# Altium PCB PCB2.PcbDoc (part 1 of 3)
Units mil, origin at the board's own origin, x right, y up, seen from the top; angles counter-clockwise.
Board outline 5145 x 1874.68 mil, 6 copper layers (Top Copper, Signal Layer 1, Signal Layer 2, Signal Layer 3, Signal Layer 4, Bottom Copper), stack 60.567 mil thick; 68 components, 78 nets, 530 pads, 288 vias.
Unrouted connection lines stored in the file: 13.
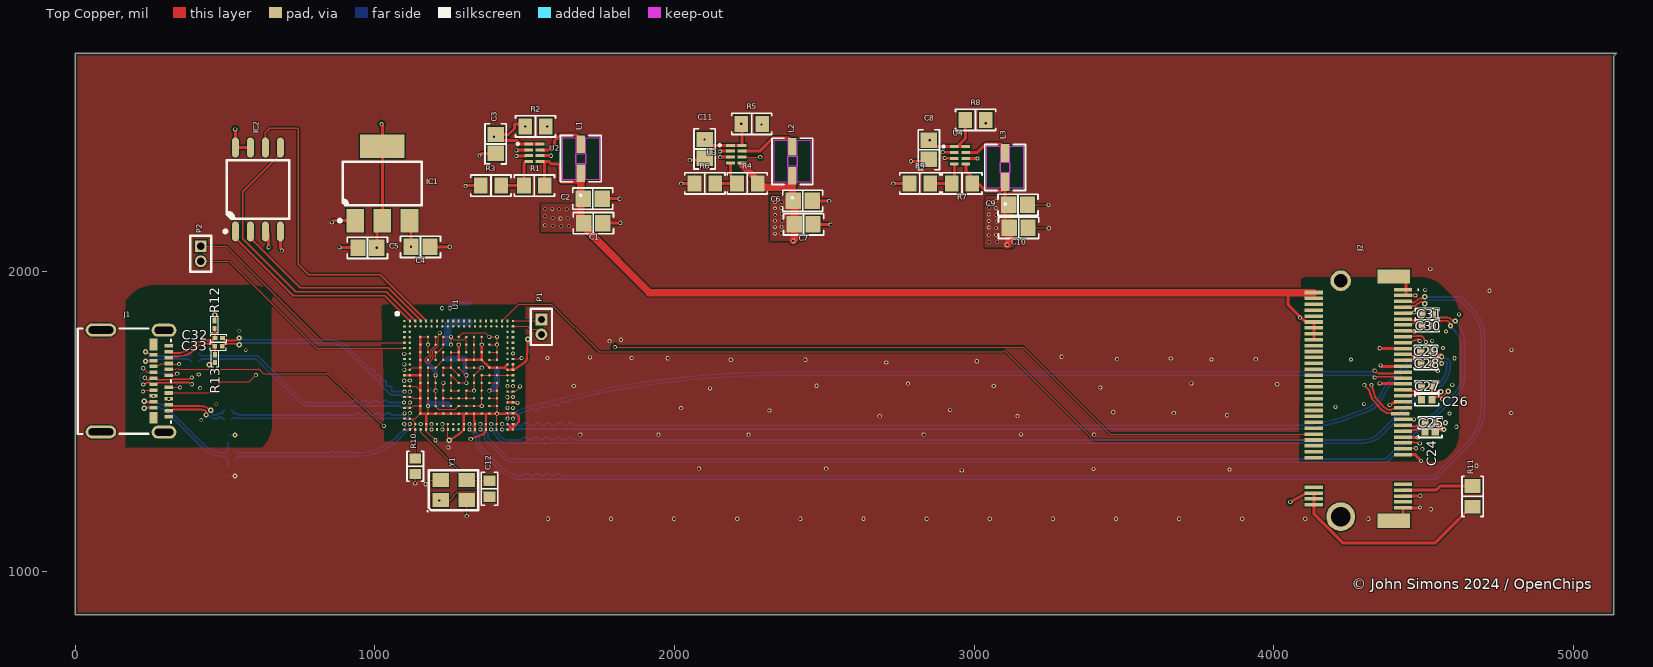
[diagram p0: Top Copper view]
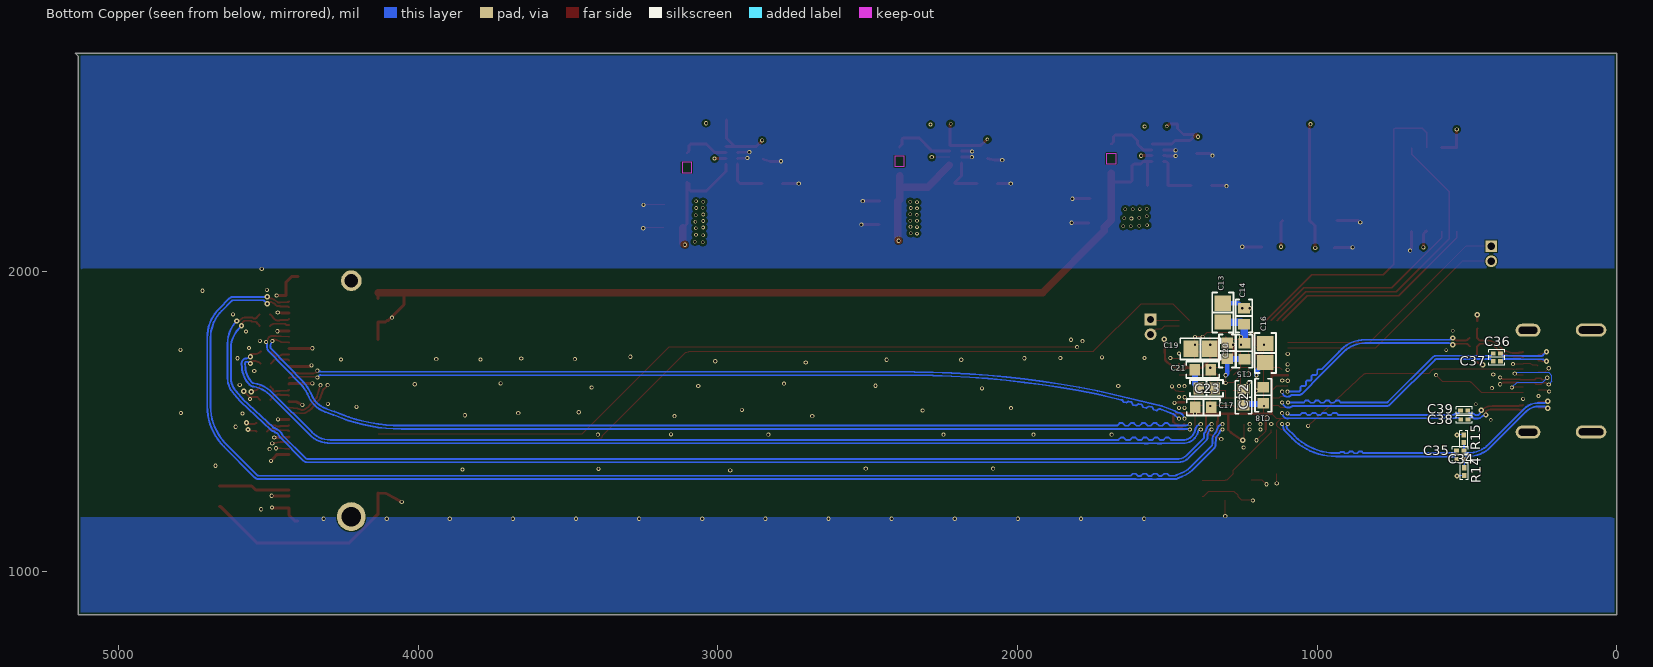
[diagram p1: Bottom Copper view, seen from below]
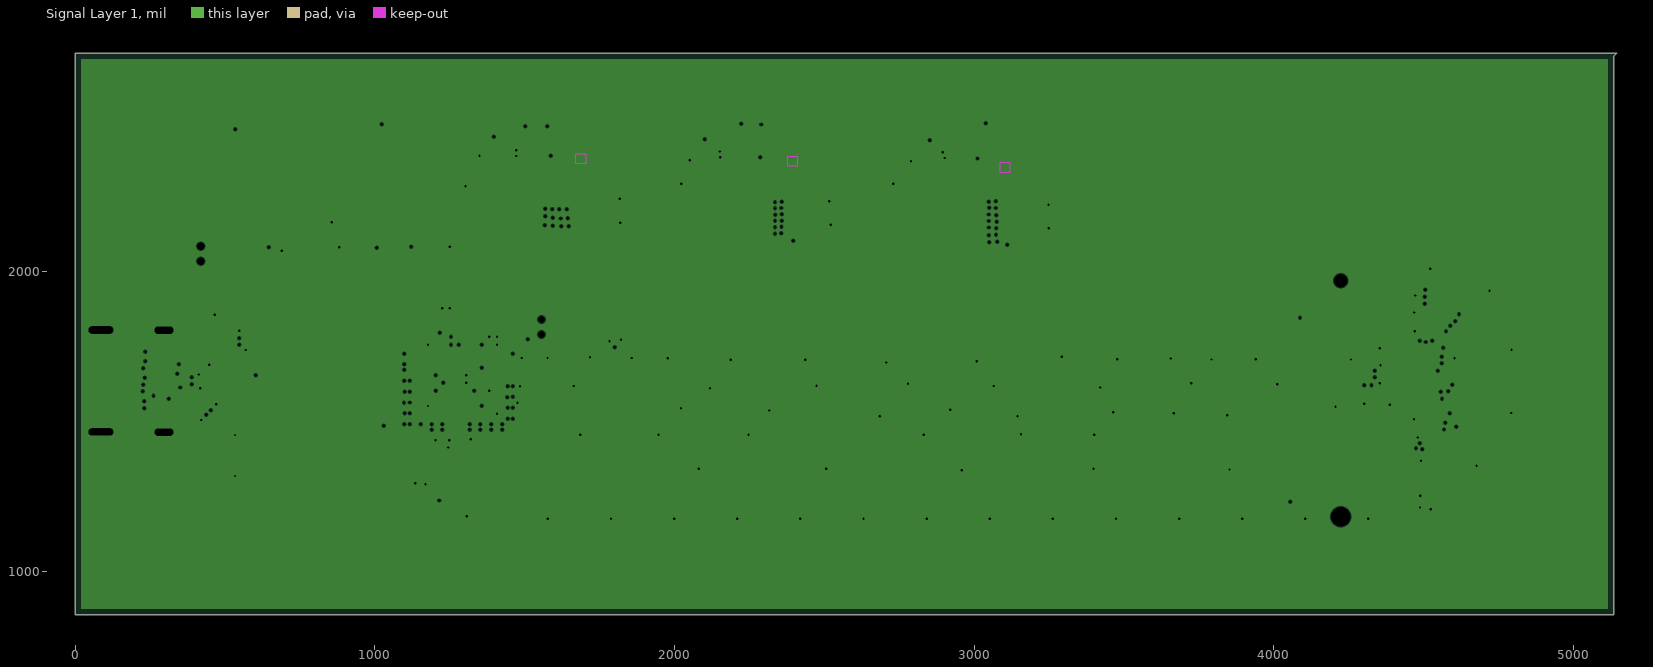
[diagram p2: Signal Layer 1, clearances drawn from the general rule]
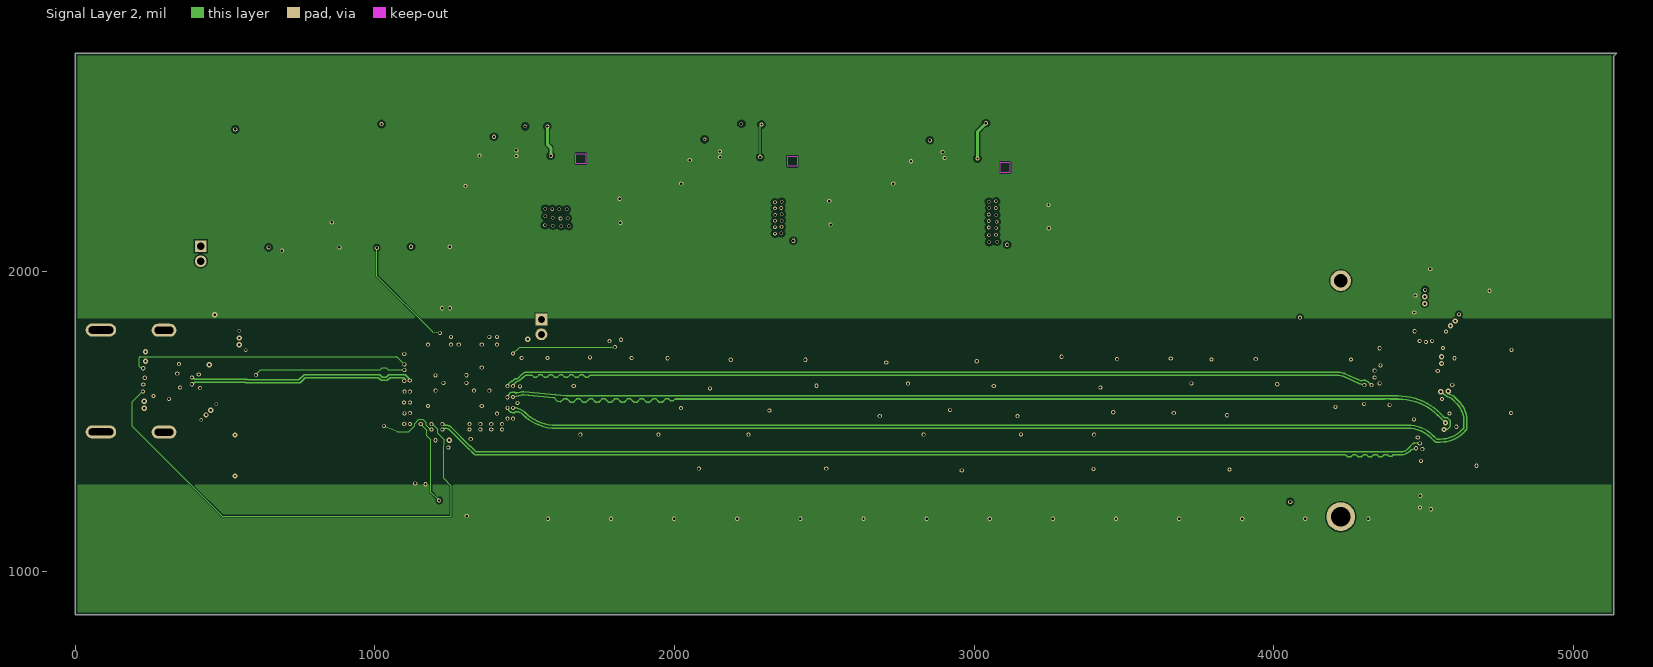
[diagram p3: Signal Layer 2]
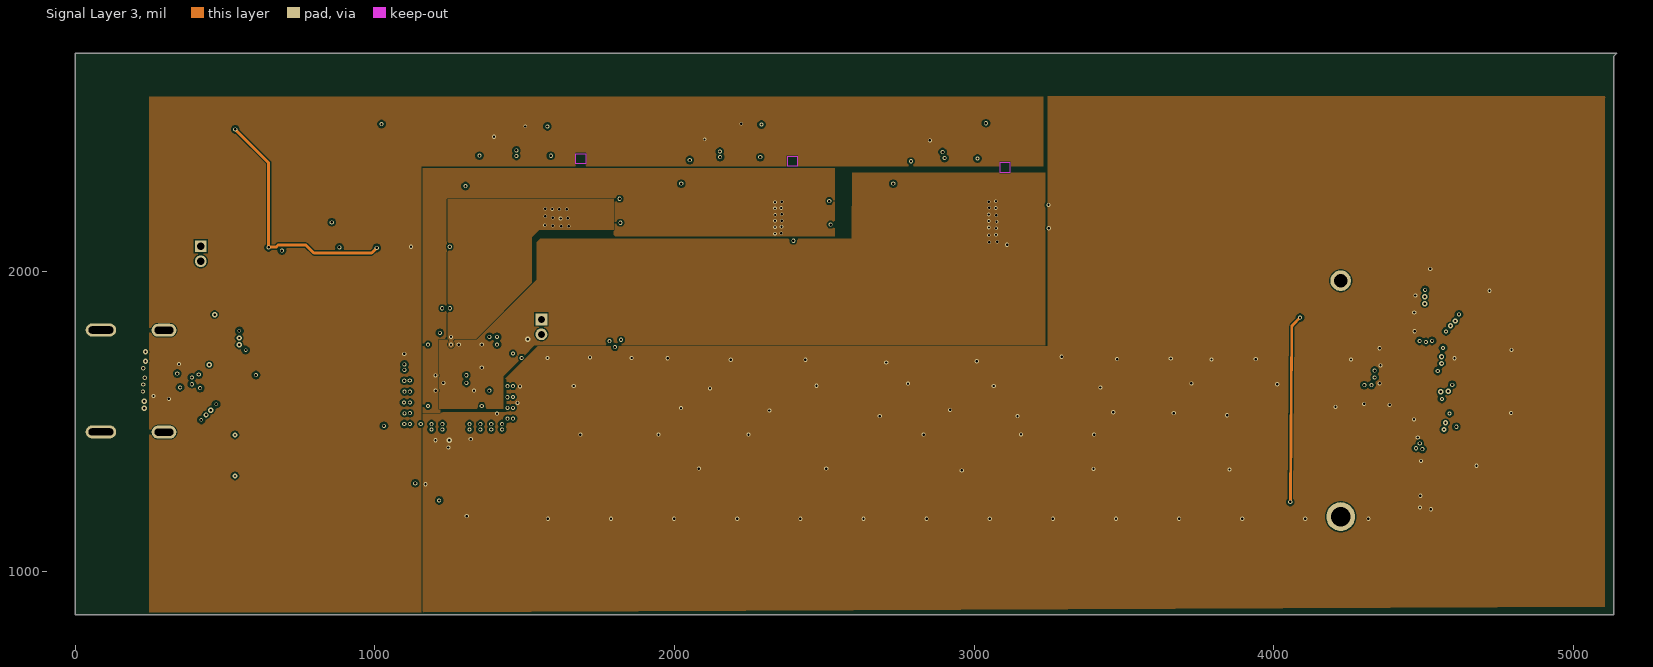
[diagram p4: Signal Layer 3]
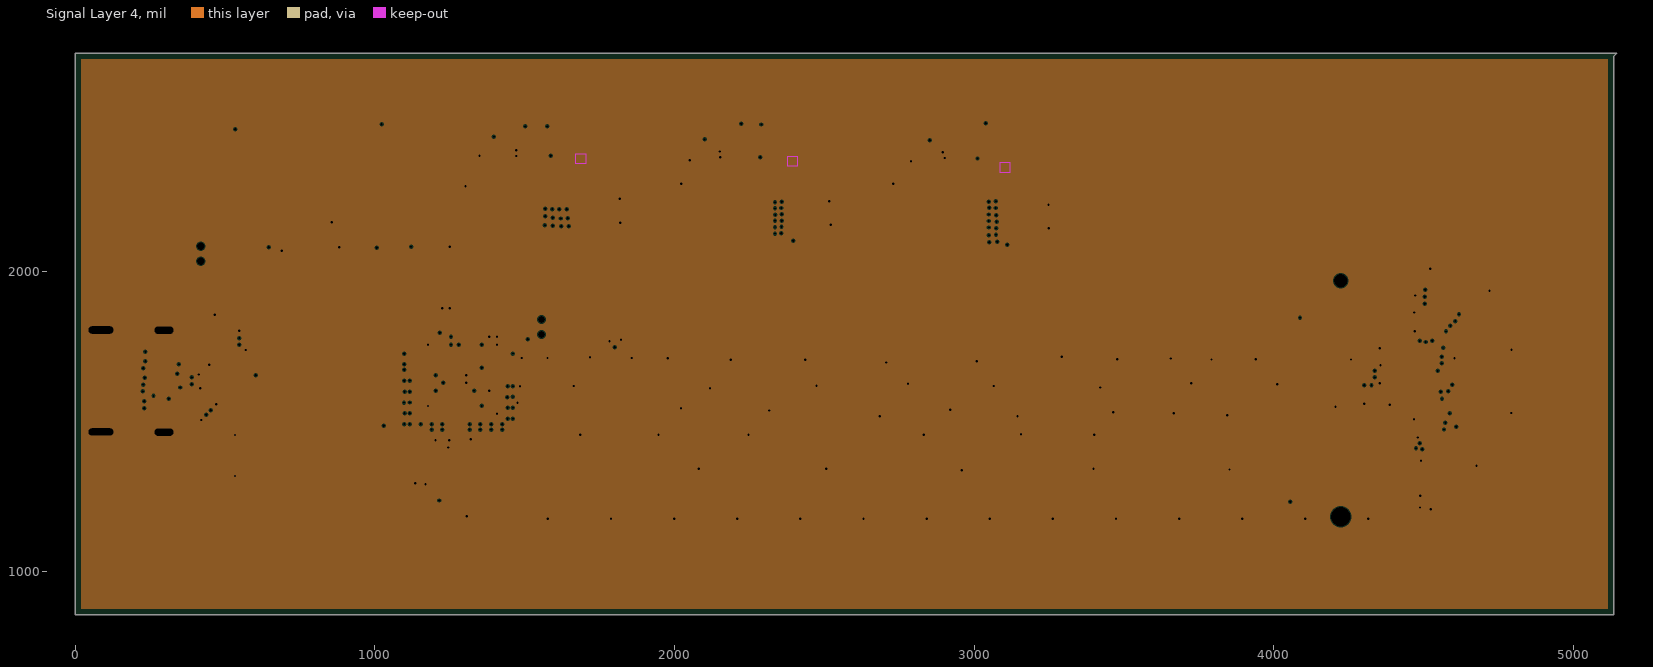
[diagram p5: Signal Layer 4, clearances drawn from the general rule]
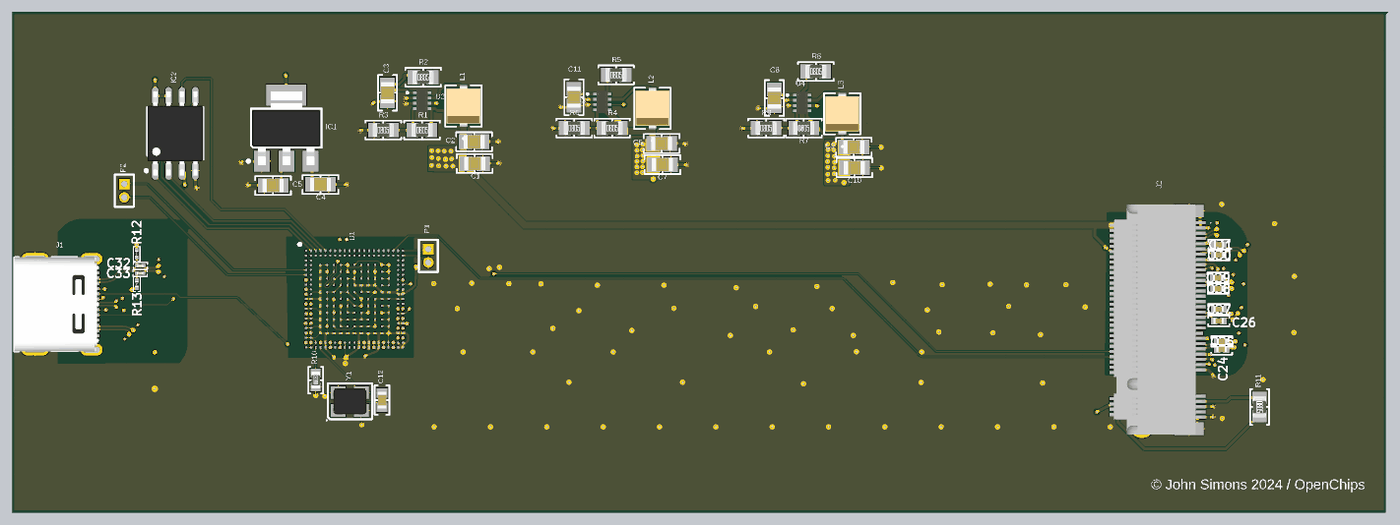
[diagram p7: 3D render of the assembled board from above, using the file's embedded part models]
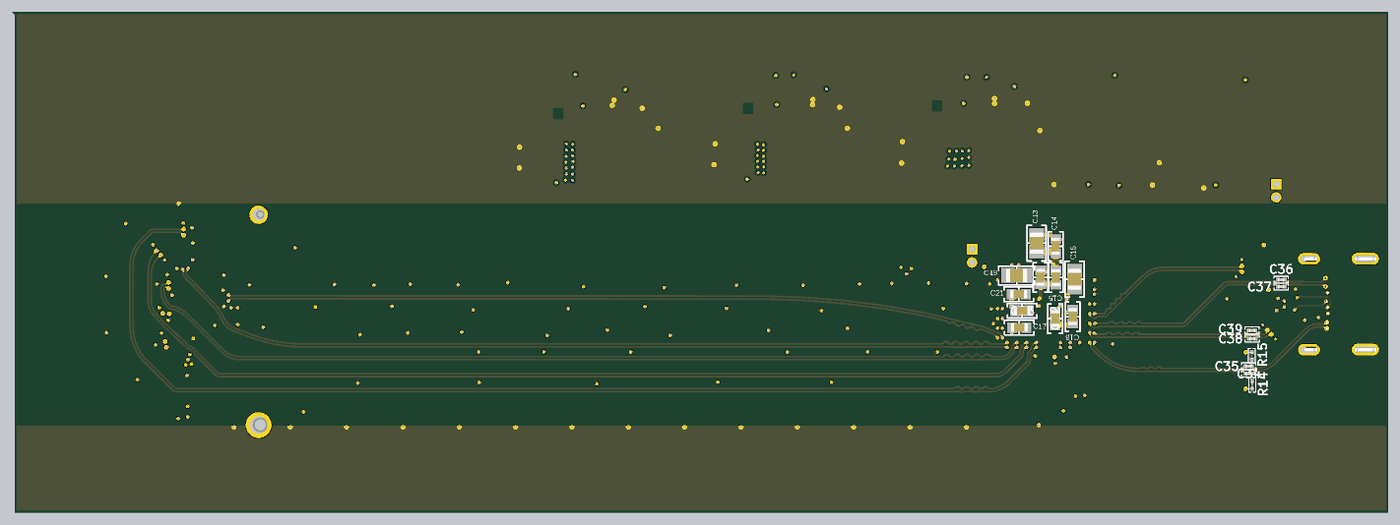
[diagram p8: 3D render of the assembled board from below, using the file's embedded part models]

## Layer stack, top to bottom
Top Mask: solder mask 0.5909, Solder Resist, Dk 3.8
Top Copper: signal copper 1.378
Dielectric 1: prepreg 3.9134, 2313, Dk 4.05
Signal Layer 1: plane copper 0.5984, net GND
Core 1: core 21.6535, FR-4, Dk 4.5
Signal Layer 2: signal copper 0.5984
Dielectric 2: prepreg 4.2835, 2116, Dk 4.25
Signal Layer 3: signal copper 0.5984
Core 2: core 21.6535, FR-4, Dk 4.5
Signal Layer 4: plane copper 0.5984, net GND
Dielectric 3: prepreg 3.9134, 2313, Dk 4.05
Bottom Copper: signal copper 1.378
Bottom Mask: solder mask 0.5909, Solder Resist, Dk 3.8

## Board outline
0,855.32 0,2730 5145,2730 5135,2720 5135,855.32

## Design rules (kind name [scope] priority, off if disabled: settings)
BoardOutlineClearance [All] p1: gap=7.87 ignorepadtopadclearanceinfootprint=FALSE
Clearance [All] p1: gap=3.5 ignorepadtopadclearanceinfootprint=FALSE except(5: Arc-Via Track-Via SMDPad-Via THPad-Via Via-Via Via-Fill Via-Poly Via-Region Via-Text; 9.84: Arc-Hole Track-Hole SMDPad-Hole THPad-Hole Via-Hole Fill-Hole Poly-Hole Region-Hole Text-Hole)
ComponentClearance [All] p1: gap=3.5 collisioncheckmode=3 verticalgap=3.5 showdistances=TRUE
DiffPairsRouting DiffPairsRouting_1 [InDifferentialPairClass('D100')] p1: maxlimit=5 minlimit=5 mostfreqgap=5 toplayer_minwidth=6.22 toplayer_maxwidth=6.22 toplayer_prefwidth=6.22 midlayer2_minwidth=5.12 midlayer2_maxwidth=5.12 midlayer2_prefwidth=5.12 midlayer3_minwidth=5.12 midlayer3_maxwidth=5.12 midlayer3_prefwidth=5.12 bottomlayer_minwidth=6.22 bottomlayer_maxwidth=6.22 bottomlayer_prefwidth=6.22 impedanceprofiledriven=TRUE impedanceprofileid={64242A25-4741-4EBC-97D7-1A256290CCA1} impedanceprofilevalue=85.000000 maxuncoupledlength=500
DiffPairsRouting [InDifferentialPairClass('D90')] p2: maxlimit=5 minlimit=5 mostfreqgap=5 toplayer_minwidth=6.22 toplayer_maxwidth=6.22 toplayer_prefwidth=6.22 midlayer2_minwidth=5.12 midlayer2_maxwidth=5.12 midlayer2_prefwidth=5.12 midlayer3_minwidth=5.12 midlayer3_maxwidth=5.12 midlayer3_prefwidth=5.12 bottomlayer_minwidth=6.22 bottomlayer_maxwidth=6.22 bottomlayer_prefwidth=6.22 impedanceprofiledriven=TRUE impedanceprofileid={64242A25-4741-4EBC-97D7-1A256290CCA1} impedanceprofilevalue=85.000000 maxuncoupledlength=500
Height [All] p1: minheight=0 maxheight=71497.94 prefheight=500
HoleSize [All] p1: absolutevalues=TRUE maxlimit=248.03 minlimit=7.87 maxpercent=80.000 minpercent=20.000
HoleToHoleClearance [All] p1: gap=9.84 allowstackedmicrovias=FALSE
MatchedLengths MatchedLengths_USB_DiffPairs [InxSignalClass('USB_CHJ1_1_DL') OR InxSignalClass('USB_CHJ1_1_RX') OR InxSignalClass('USB_CHJ1_1_TX')] p1: tolerance=5 checknetsindiffpair=TRUE checkdiffpairvsdiffpair=FALSE checkxsignals=FALSE checkothers=FALSE
MatchedLengths MatchedLengths_PCIe_DiffPairs [InDifferentialPairClass('All Differential Pairs')] p2: tolerance=5 checknetsindiffpair=TRUE checkdiffpairvsdiffpair=FALSE checkxsignals=FALSE checkothers=FALSE
MinimumAnnularRing [All] p1: minimumring=3
MinimumSolderMaskSliver [All] p1: minsoldermaskwidth=0
PlaneClearance [All] p1: clearance=3.5
PlaneConnect PlaneConnectPowerPads [InPadClass('PowerPads')] p1: planeconnectstyle=Direct reliefexpansion=20 reliefentries=4 reliefconductorwidth=10 reliefairgap=10
PlaneConnect [All] p2: pad.planeconnectstyle=Relief pad.reliefexpansion=11.81 pad.reliefentries=4 pad.reliefconductorwidth=3.5 pad.reliefairgap=3.5 via.planeconnectstyle=Direct via.reliefexpansion=11.81 via.reliefentries=4 via.reliefconductorwidth=5 via.reliefairgap=5
PolygonConnect PolygonConnectPowerPads [All vs (InPadClass('PowerPads'))] p1: connectstyle=Direct reliefconductorwidth=10 reliefentries=4 polygonreliefangle="90 Angle" airgapwidth=10
PolygonConnect [All] p2: thpad.connectstyle=Relief thpad.reliefconductorwidth=3.5 thpad.reliefentries=4 thpad.polygonreliefangle="90 Angle" thpad.airgapwidth=3.5 smdpad.connectstyle=Relief smdpad.reliefconductorwidth=3.5 smdpad.reliefentries=4 smdpad.polygonreliefangle="90 Angle" smdpad.airgapwidth=3.5 via.connectstyle=Direct via.reliefconductorwidth=5 via.reliefentries=4 via.polygonreliefangle="90 Angle" via.airgapwidth=5
RoutingVias [All] p1: holewidth=7.87 width=17.72 viastyle="Through Hole" minholewidth=7.87 minwidth=17.72 maxholewidth=248.03 maxwidth=257.87
SilkToSilkClearance [All] p1: silktosilkclearance=0
SilkToSolderMaskClearance [IsPad] p1: minsilkscreentomaskgap=3.5 clearancetoexposedcopper=TRUE
SolderMaskExpansion [All] p1: expansion=2.95 istentingtop=FALSE
Width [All] p1: maxlimit=25 minlimit=3.5 preferedwidth=3.5 minimp=50.000000 maximp=50.000000 favimp=50.000000
20 further rules are at their usual default settings.

## Classes and differential pairs
differential pair class D100: PRX0 PRX1 PRX2 PRX3 PTX0 PTX0_PD PTX1 PTX1_PD PTX2 PTX2_PD PTX3 PTX3_PD REFCLK URX0_PD URX1_PD UTX0_PD UTX1_PD
differential pair class D90: UD URX0 URX1 UTX0 UTX1
component class Power: C1 C2 C3 C4 C5 C6 C7 C8 C9 C10 C11 C13 C14 C15 C16 C17 C18 C19 C20 C21 C22 C23 IC1 L1 L2 L3 R1 R2 R3 R4 R5 R6 R7 R8 R9 U2 U3 U4
component class Main: C12 C24 C25 C26 C27 C28 C29 C30 C31 C32 C33 C34 C35 C36 C37 C38 C39 IC2 J1 J2 P1 P2 R10 R11 R12 R13 R14 R15 U1 Y1
differential pair UTX1_PD: +UTX1_PD_P -UTX1_PD_N
differential pair UTX0_PD: +UTX0_PD_P -UTX0_PD_N
differential pair URX1_PD: +URX1_PD_P -URX1_PD_N
differential pair URX0_PD: +URX0_PD_P -URX0_PD_N
differential pair PTX3_PD: +PTX3_PD_P -PTX3_PD_N
differential pair PTX2_PD: +PTX2_PD_P -PTX2_PD_N
differential pair PTX1_PD: +PTX1_PD_P -PTX1_PD_N
differential pair PTX0_PD: +PTX0_PD_P -PTX0_PD_N
differential pair REFCLK: +REFCLK_P -REFCLK_N
differential pair PTX3: +PTX3_P -PTX3_N
differential pair PTX2: +PTX2_P -PTX2_N
differential pair PTX1: +PTX1_P -PTX1_N
differential pair PTX0: +PTX0_P -PTX0_N
differential pair PRX3: +PRX3_P -PRX3_N
differential pair PRX2: +PRX2_P -PRX2_N
differential pair PRX1: +PRX1_P -PRX1_N
differential pair PRX0: +PRX0_P -PRX0_N
differential pair UTX1: +UTX1_P -UTX1_N
differential pair UTX0: +UTX0_P -UTX0_N
differential pair URX1: +URX1_P -URX1_N
differential pair URX0: +URX0_P -URX0_N
differential pair UD: +UD_P -UD_N

## Components (designator, comment, footprint, x,y, rotation, side; value= is the part's Value field where it differs from the comment)
C1 "10 µF" "CAP 0805_2012" 1729.33,2162.4 r180 top
C2 "10 µF" "CAP 0805_2012" 1727.36,2244.09 r180 top
C3 "10 µF" "CAP 0805_2012" 1403.54,2427.17 r90 top
C4 "10 µF" "CAP 0805_2012" 1152.56,2083.66 r180 top
C5 "10 µF" "CAP 0805_2012" 975.39,2079.72 r0 top
C6 "10 µF" "CAP 0805_2012" 2428.15,2237.2 r180 top
C7 "10 µF" "CAP 0805_2012" 2431.1,2158.46 r180 top
C8 "10 µF" "CAP 0805_2012" 2849.41,2407.48 r90 top
C9 "10 µF" "CAP 0805_2012" 3146.65,2223.43 r180 top
C10 "10 µF" "CAP 0805_2012" 3148.62,2146.65 r180 top
C11 "10 µF" "CAP 0805_2012" 2100.39,2410.43 r90 top
C12 "10 pF" "CAP 0603_1608" 1382.87,1276.57 r90 top
C13 "10 µF" "CAP 0805_2012" 1314.96,1864.17 r270 bottom
C14 "100 pF" "CAP 0603_1608" 1244.09,1852.36 r270 bottom
C15 "100 pF" "CAP 0603_1608" 1243.11,1735.24 r90 bottom
C16 "10 µF" "CAP 0805_2012" 1173.23,1729.33 r270 bottom
C17 "100 pF" "CAP 0603_1608" 1379.92,1548.23 r180 bottom
C18 "100 pF" "CAP 0603_1608" 1180.12,1588.58 r90 bottom
C19 "10 µF" "CAP 0805_2012" 1389.76,1743.11 r180 bottom
C20 "100 pF" "CAP 0603_1608" 1300.2,1736.22 r90 bottom
C21 "100 pF" "CAP 0603_1608" 1381.89,1673.23 r180 bottom
C22 "100 pF" "CAP 0603_1608" 1246.06,1581.69 r90 bottom
C23 "100 pF" "CAP 0603_1608" 1369.09,1611.22 r180 bottom
C24 "0.22 µF" "CAP 0402_1005" 4521.65,1466.54 r0 top
C25 "0.22 µF" "CAP 0402_1005" 4522.64,1496.06 r0 top
C26 "0.22 µF" "CAP 0402_1005" 4510.83,1572.83 r0 top
C27 "0.22 µF" "CAP 0402_1005" 4510.83,1617.13 r0 top
C28 "0.22 µF" "CAP 0402_1005" 4508.86,1693.9 r0 top
C29 "0.22 µF" "CAP 0402_1005" 4507.87,1734.25 r0 top
C30 "0.22 µF" "CAP 0402_1005" 4511.81,1819.88 r0 top
C31 "0.22 µF" "CAP 0402_1005" 4511.81,1858.27 r0 top
C32 "0.33 µF" "CAP 0201_0603" 479.33,1779.53 r0 top
C33 "0.33 µF" "CAP 0201_0603" 478.35,1751.97 r0 top
C34 "0.33 µF" "CAP 0201_0603" 522.05,1375.98 r0 bottom
C35 "0.33 µF" "CAP 0201_0603" 522.64,1403.54 r0 bottom
C36 "0.22 µF" "CAP 0201_0603" 400.59,1727.36 r0 bottom
C37 "0.22 µF" "CAP 0201_0603" 400.59,1701.77 r0 bottom
C38 "0.22 µF" "CAP 0201_0603" 508.86,1506.89 r0 bottom
C39 "0.22 µF" "CAP 0201_0603" 509.84,1537.4 r0 bottom
IC1 "LD1117S33TR" "ST SOT-223" 1025,2295 r90 top
IC2 "W25Q32JVSSIQ TR" "WINBOND SOIC-8 208MIL WIDE" 610,2275 r90 top
J1 "1054500101" "Molex 1054500101" 287.01,1635.16 r270 top
J2 "1-2199230-6" 121992306 4282.48,1576.77 r270 top
L1 "IHLP1212AEERR47M11" IND_IHLP-1212AE_VIS 1687.44,2377.68 r90 top
L2 "IHLP1212AEERR47M11" IND_IHLP-1212AE_VIS 2393.7,2368.8 r90 top
L3 "IHLP1212AEERR47M11" IND_IHLP-1212AE_VIS 3103.35,2348.43 r90 top
P1 "MHDR1X2" MHDR1X2 1556.1,1841.54 r270 top
P2 "MHDR1X2" MHDR1X2 419.29,2085.43 r270 top
R1 "1.1 MOhms" "RES 0805_2012" 1532.44,2287.68 r0 top
R2 "100 kOhms" "RES 0805_2012" 1536.42,2485.24 r0 top
R3 "200 kOhms" "RES 0805_2012" 1387.44,2287.68 r0 top
R4 "523 kOhms" "RES 0805_2012" 2243.11,2295.28 r0 top
R5 "100 kOhms" "RES 0805_2012" 2257.87,2494.09 r0 top
R6 "200 kOhms" "RES 0805_2012" 2101.38,2295.28 r0 top
R7 "220 kOhms" "RES 0805_2012" 2959.65,2295.28 r0 top
R8 "100 kOhms" "RES 0805_2012" 3004.92,2506.89 r0 top
R9 "200 kOhms" "RES 0805_2012" 2818.9,2295.28 r0 top
R10 "12.1 kOhms" "RES 0603_1608" 1134.84,1351.38 r90 top
R11 "10 kOhms" "RES 0805_2012" 4663.39,1250.98 r270 top
R12 "220 kOhms" "RES 0201_0603" 465.55,1823.82 r90 top
R13 "220 kOhms" "RES 0201_0603" 466.54,1710.63 r90 top
R14 "220 kOhms" "RES 0201_0603" 509.25,1333.66 r270 bottom
R15 "220 kOhms" "RES 0201_0603" 510.83,1442.91 r90 bottom
U1 "ASM2464PD" BGA273C46P21X21_1000X1000X98_2 1280,1655 r0 top
U2 "XPS628304ARZER" WQFN-HR8_RZE_TEX 1532.44,2397.68 r0 top
U3 "XPS628303ARZER" WQFN-HR8_RZE_TEX 2206.26,2392.99 r0 top
U4 "XPS628303ARZER" WQFN-HR8_RZE_TEX 2953.19,2388.86 r0 top
Y1 "25MHz" "ABRACON ABM8G" 1262.8,1271.65 r0 top

## Footprints (in the part's own frame and the unit in brackets; to place one, negate y for a bottom-side part, rotate by r counter-clockwise, add the part's x,y. Pads: shape width x height; smd on the part's side, far side on the other; paste and mask are expansions set on the pad)
121992306 [mm]
  rect 0.3x1.55 smd: 1(-9.25,3.775) 2(-9,-3.775) 3(-8.75,3.775) 4(-8.5,-3.775) 5(-8.25,3.775) 6(-8,-3.775) 7(-7.75,3.775) 8(-7.5,-3.775) 9(-7.25,3.775) 10(-7,-3.775) 11(-6.75,3.775) 12(-6.5,-3.775) 13(-6.25,3.775) 14(-6,-3.775) 15(-5.75,3.775) 16(-5.5,-3.775) 17(-5.25,3.775) 18(-5,-3.775) 19(-4.75,3.775) 20(-4.5,-3.775) 21(-4.25,3.775) 22(-4,-3.775) 23(-3.75,3.775) 24(-3.5,-3.775) 25(-3.25,3.775) 26(-3,-3.775) 27(-2.75,3.775) 28(-2.5,-3.775) 29(-2.25,3.775) 30(-2,-3.775) 31(-1.75,3.775) 32(-1.5,-3.775) 33(-1.25,3.775) 34(-1,-3.775) 35(-0.75,3.775) 36(-0.5,-3.775) 37(-0.25,3.775) 38(0,-3.775) 39(0.25,3.775) 40(0.5,-3.775) 41(0.75,3.775) 42(1,-3.775) 43(1.27,3.556) 44(1.5,-3.775) 45(1.75,3.775) 46(2,-3.775) 47(2.25,3.775) 48(2.5,-3.775) 49(2.75,3.775) 50(3,-3.775) 51(3.25,3.775) 52(3.5,-3.775) 53(3.75,3.775) 54(4,-3.775) 55(4.25,3.775) 56(4.5,-3.775) 57(4.75,3.775) 58(5,-3.775) 67(7.25,3.775) 68(7.5,-3.775) 69(7.75,3.775) 70(8,-3.775) 71(8.25,3.775) 72(8.5,-3.775) 73(8.75,3.775) 74(9,-3.775) 75(9.25,3.775)
  round 1.75 hole 1.15: MH1(-10,-1.5)
  round 2.45 hole 1.65: MH2(10,-1.5)
  rect 1.2x2.75 smd: MP1(-10.35,3) MP2(10.35,3)
  silkscreen extent -9.27,5.03 -9.2,5.1, body extent -10.98,-4.51 10.92,4.19, height 4.43
"ABRACON ABM8G" [mm] "Crystal, 4-Leads, Body 2.50x3.20mm, Pitch 2.20mm, IPC Medium Density"
  rect 1.4x1.2 smd: 1(-1.1,-0.85) 2(1.1,-0.85) 3(1.1,0.85) 4(-1.1,0.85)
  silkscreen extent -2.25,-1.85 2.1,1.7, body extent -1.61,-1.26 1.61,1.26, height 0.6
BGA273C46P21X21_1000X1000X98_2 [mm] "BGA, 273-Leads, Body 10,00x10,00mmx0,98mm, Pitch 0,46mm"
  round 0.2 smd: A1(-4.6,4.6) A21(4.6,4.6) AA1(-4.6,-4.6) AA21(4.6,-4.6) B2(-4.14,4.14) B3(-3.68,4.14) B4(-3.22,4.14) B5(-2.76,4.14) B6(-2.3,4.14) B7(-1.84,4.14) B8(-1.38,4.14) B9(-0.92,4.14) B10(-0.46,4.14) B11(0,4.14) B12(0.46,4.14) B13(0.92,4.14) B14(1.38,4.14) B15(1.84,4.14) B16(2.3,4.14) B17(2.76,4.14) B18(3.22,4.14) B19(3.68,4.14) B20(4.14,4.14) C2(-4.14,3.68) C20(4.14,3.68) D2(-4.14,3.22) D4(-3.25,3.25) D5(-2.6,3.25) D6(-1.95,3.25) D8(-1.3,3.25) D9(-0.65,3.25) D11(0,3.25) D13(0.65,3.25) D14(1.3,3.25) D16(1.95,3.25) D17(2.6,3.25) D18(3.25,3.25) D20(4.14,3.22) E2(-4.14,2.76) E4(-3.25,2.6) E5(-2.6,2.6) E6(-1.95,2.6) E8(-1.3,2.6) E9(-0.65,2.6) E11(0,2.6) E13(0.65,2.6) E14(1.3,2.6) E16(1.95,2.6) E17(2.6,2.6) E18(3.25,2.6) E20(4.14,2.76) F2(-4.14,2.3) F4(-3.25,1.95) F5(-2.6,1.95) F6(-1.95,1.95) F8(-1.3,1.95) F9(-0.65,1.95) F11(0,1.95) F13(0.65,1.95) F14(1.3,1.95) F16(1.95,1.95) F17(2.6,1.95) F18(3.25,1.95) F20(4.14,2.3) G2(-4.14,1.84) G20(4.14,1.84) H2(-4.14,1.38) H4(-3.25,1.3) H5(-2.6,1.3) H6(-1.95,1.3) H8(-1.3,1.3) H9(-0.65,1.3) H11(0,1.3) H13(0.65,1.3) H14(1.3,1.3) H16(1.95,1.3) H17(2.6,1.3) H18(3.25,1.3) H20(4.14,1.38) J2(-4.14,0.92) J4(-3.25,0.65) J5(-2.6,0.65) J6(-1.95,0.65) J8(-1.3,0.65) J9(-0.65,0.65) J11(0,0.65) J13(0.65,0.65) J14(1.3,0.65) J16(1.95,0.65) J17(2.6,0.65) J18(3.25,0.65) J20(4.14,0.92) K2(-4.14,0.46) K20(4.14,0.46) L2(-4.14,0) L4(-3.25,0) L5(-2.6,0) L6(-1.95,0) L8(-1.3,0) L9(-0.65,0) L11(0,0) L13(0.65,0) L14(1.3,0) L16(1.95,0) L17(2.6,0) L18(3.25,0) L20(4.14,0) M2(-4.14,-0.46) M20(4.14,-0.46) N2(-4.14,-0.92) N4(-3.25,-0.65) N5(-2.6,-0.65) N6(-1.95,-0.65) N8(-1.3,-0.65) N9(-0.65,-0.65) N11(0,-0.65) N13(0.65,-0.65) N14(1.3,-0.65) N16(1.95,-0.65) N17(2.6,-0.65) N18(3.25,-0.65) N20(4.14,-0.92) P2(-4.14,-1.38) P4(-3.25,-1.3) P5(-2.6,-1.3) P6(-1.95,-1.3) P8(-1.3,-1.3) P9(-0.65,-1.3) P11(0,-1.3) P13(0.65,-1.3) P14(1.3,-1.3) P16(1.95,-1.3) P17(2.6,-1.3) P18(3.25,-1.3) P20(4.14,-1.38) R2(-4.14,-1.84) R20(4.14,-1.84) T2(-4.14,-2.3) T4(-3.25,-1.95) T5(-2.6,-1.95) T6(-1.95,-1.95) T8(-1.3,-1.95) T9(-0.65,-1.95) T11(0,-1.95) T13(0.65,-1.95) T14(1.3,-1.95) T16(1.95,-1.95) T17(2.6,-1.95) T18(3.25,-1.95) T20(4.14,-2.3) U2(-4.14,-2.76) U4(-3.25,-2.6) U5(-2.6,-2.6) U6(-1.95,-2.6) U8(-1.3,-2.6) U9(-0.65,-2.6) U11(0,-2.6) U13(0.65,-2.6) U14(1.3,-2.6) U16(1.95,-2.6) U17(2.6,-2.6) U18(3.25,-2.6) U20(4.14,-2.76) V2(-4.14,-3.22) V4(-3.25,-3.25) V5(-2.6,-3.25) V6(-1.95,-3.25) V8(-1.3,-3.25) V9(-0.65,-3.25) V11(0,-3.25) V13(0.65,-3.25) V14(1.3,-3.25) V16(1.95,-3.25) V17(2.6,-3.25) V18(3.25,-3.25) V20(4.14,-3.22) W2(-4.14,-3.68) W20(4.14,-3.68) Y2(-4.14,-4.14) Y3(-3.68,-4.14) Y4(-3.22,-4.14) Y5(-2.76,-4.14) Y6(-2.3,-4.14) Y7(-1.84,-4.14) Y8(-1.38,-4.14) Y9(-0.92,-4.14) Y10(-0.46,-4.14) Y11(0,-4.14) Y12(0.46,-4.14) Y13(0.92,-4.14) Y14(1.38,-4.14) Y15(1.84,-4.14) Y16(2.3,-4.14) Y17(2.76,-4.14) Y18(3.22,-4.14) Y19(3.68,-4.14) Y20(4.14,-4.14)
  rrect50% 0.18x0.25 smd: A2(-4.14,4.6) A3(-3.68,4.6) A4(-3.22,4.6) A5(-2.76,4.6) A6(-2.3,4.6) A7(-1.84,4.6) A8(-1.38,4.6) A9(-0.92,4.6) A10(-0.46,4.6) A11(0,4.6) A12(0.46,4.6) A13(0.92,4.6) A14(1.38,4.6) A15(1.84,4.6) A16(2.3,4.6) A17(2.76,4.6) A18(3.22,4.6) A19(3.68,4.6) A20(4.14,4.6) AA2(-4.14,-4.6) AA3(-3.68,-4.6) AA4(-3.22,-4.6) AA5(-2.76,-4.6) AA6(-2.3,-4.6) AA7(-1.84,-4.6) AA8(-1.38,-4.6) AA9(-0.92,-4.6) AA10(-0.46,-4.6) AA11(0,-4.6) AA12(0.46,-4.6) AA13(0.92,-4.6) AA14(1.38,-4.6) AA15(1.84,-4.6) AA16(2.3,-4.6) AA17(2.76,-4.6) AA18(3.22,-4.6) AA19(3.68,-4.6) AA20(4.14,-4.6)
  rrect50% 0.25x0.18 smd: B1(-4.6,4.14) C1(-4.6,3.68) D1(-4.6,3.22) E1(-4.6,2.76) F1(-4.6,2.3) G1(-4.6,1.84) H1(-4.6,1.38) J1(-4.6,0.92) K1(-4.6,0.46) L1(-4.6,0) M1(-4.6,-0.46) N1(-4.6,-0.92) P1(-4.6,-1.38) R1(-4.6,-1.84) T1(-4.6,-2.3) U1(-4.6,-2.76) V1(-4.6,-3.22) W1(-4.6,-3.68) Y1(-4.6,-4.14)
  rrect50% 0.25x0.2 smd paste-2539.97: B21(4.6,4.14) C21(4.6,3.68) D21(4.6,3.22) E21(4.6,2.76) F21(4.6,2.3) G21(4.6,1.84) H21(4.6,1.38) J21(4.6,0.92) K21(4.6,0.46) L21(4.6,0) M21(4.6,-0.46) N21(4.6,-0.92) P21(4.6,-1.38) R21(4.6,-1.84) T21(4.6,-2.3) U21(4.6,-2.76) V21(4.6,-3.22) W21(4.6,-3.68) Y21(4.6,-4.14)
  silkscreen extent -5.33,5.09 -5.08,5.33, body extent -5,-5 5,5, height 0.99
"CAP 0201_0603" [mm] "Chip Capacitor, 2-Leads, Body 0.60x0.30mm, IPC Medium Density"
  rect 0.4x0.35 smd: 1(-0.31,0) 2(0.31,0)
  silkscreen extent -0.67,-0.33 0.67,0.33, body extent -0.3,-0.15 0.3,0.15, height 0.3
"CAP 0402_1005" [mm] "Chip Capacitor, 2-Leads, Body 1.02x0.51mm, IPC Medium Density"
  rect 0.6x0.64 smd: 1(-0.44,0) 2(0.44,0)
  silkscreen extent -1,-0.5 1,0.5, body extent -0.5,-0.26 0.5,0.26, height 0.52
"CAP 0603_1608" [mm] "Chip Capacitor, 2-Leads, Body 1.60x0.80mm, IPC Medium Density"
  rect 0.9x1 smd: 1(-0.675,0) 2(0.675,0)
  silkscreen extent -1.4,-0.7 1.4,0.7, body extent -0.8,-0.41 0.8,0.41, height 0.82
"CAP 0805_2012" [mm] "Chip Capacitor, 2-Leads, Body 2.00x1.20mm, IPC Medium Density"
  rect 1.3x1.4 smd: 1(-0.8,0) 2(0.8,0)
  silkscreen extent -1.7,-0.9 1.7,0.9, body extent -1,-0.64 1,0.64, height 1.26
IND_IHLP-1212AE_VIS [mil]
  rect 58.96x28 smd paste+0 mask+0: 1(-48.52,0) 2(48.52,0)
  Top Copper keep-out region: -17.04,-16 -17.04,16 17.04,16 17.04,-16
  Top Copper keep-out region: -70,16 -70,61 70,61 70,16
  Top Copper keep-out region: -70,-61 -70,-16 70,-16 70,-61
  Keep-Out Layer region: -17.04,-16 -17.04,16 17.04,16 17.04,-16
  silkscreen extent -125,-68 77,68, body extent -72,-63 72,63, height 61
MHDR1X2 [mm] "Connector; Header; 2 Position"
  rect 1x1 hole 0.6: 1(0,0)
  round 1 hole 0.6: 2(1.27,0)
  silkscreen extent -0.9,-0.9 2.17,0.9
"Molex 1054500101" [mm] "USB-C Receptacle Connector 24 Position Surface Mount, 24 Position, Body 8.94x7.90mm"
  rect 0.3x0.7 smd: A1(-3,0.655) A2(-2.5,0.655) A3(-2,0.655) A4(-1.5,0.655) A5(-1,0.655) A6(-0.5,0.655) A7(0.5,0.655) A8(1,0.655) A9(1.5,0.655) A10(2,0.655) A11(2.5,0.655) A12(3,0.655) B2(2.25,-0.645) B3(1.75,-0.645) B4(1.25,-0.645) B5(0.75,-0.645) B6(0.25,-0.645) B7(-0.25,-0.645) B8(-0.75,-0.645) B9(-1.25,-0.645) B10(-1.75,-0.645) B11(-2.25,-0.645)
  rect 1x0.7 smd: B1(3.1,-0.655) B12(-3.1,-0.645)
  oval 1.1x2.6 hole 2.1 slot 0.6 at 0 deg unplated: S(-4.34,-5.105) S(4.3,-5.105)
  oval 1.1x2.1 hole 1.6 slot 0.6 at 0 deg unplated: S(-4.32,0.245) S(4.32,0.245)
  silkscreen extent -4.47,-7.07 4.47,0.83, body extent -4.47,-7.07 4.47,0.83, height 3.21
"RES 0201_0603" [mm] "Chip Resistor, 2-Leads, Body 0.60x0.30mm, IPC Medium Density"
  rect 0.44x0.35 smd: 1(-0.325,0) 2(0.325,0)
  silkscreen extent -0.7,-0.33 0.7,0.33, body extent -0.3,-0.15 0.3,0.15, height 0.21
"RES 0603_1608" [mm] "Chip Resistor, 2-Leads, Body 1.60x0.80mm, IPC Medium Density"
  rect 0.85x0.95 smd: 1(-0.65,0) 2(0.65,0)
  silkscreen extent -1.27,-0.7 1.27,0.7, body extent -0.8,-0.4 0.8,0.4, height 0.45
"RES 0805_2012" [mm] "Chip Resistor, 2-Leads, Body 2.00x1.25mm, IPC Medium Density"
  rect 1.15x1.35 smd: 1(-0.875,0) 2(0.875,0)
  silkscreen extent -1.7,-0.9 1.7,0.9, body extent -1,-0.62 1,0.63, height 0.6
"ST SOT-223" [mm] "SOT223, 4-Leads, Body 6.50x7.00mm (avg), Pitch 2.30mm, IPC Medium Density"
  rect 2x1.5 smd: 1(-3.15,2.3) 2(-3.15,0) 3(-3.15,-2.3)
  rect 2x3.8 smd: 4(3.15,0)
  silkscreen extent -3.27,-3.35 1.85,3.72, body extent -3.52,-3.25 3.5,3.25, height 1.8
"WINBOND SOIC-8 208MIL WIDE" [mm] "SOIC, 8-Leads, Body 5.28x5.28mm, Pitch 1.27mm, IPC Medium Density"
  oval 1.7x0.6 smd: 1(-3.55,1.905) 2(-3.55,0.635) 3(-3.55,-0.635) 4(-3.55,-1.905) 5(3.55,-1.905) 6(3.55,-0.635) 7(3.55,0.635) 8(3.55,1.905)
  silkscreen extent -3.67,-2.65 2.47,2.88, body extent -4.01,-2.64 4.01,2.64, height 1.5
WQFN-HR8_RZE_TEX [mil]
  rect 29x10 smd paste+0 mask+0: 1(-19,29.53) 2(-19,9.84) 3(-19,-9.84) 4(-19,-29.53) 5(19,-29.53) 6(19,-9.84) 7(19,9.84) 8(19,29.53)
  silkscreen extent -59,26 -51,34, body extent -21,-41 21,41, height 32

## Part data
C1 C2 C3 C4 C5 C6 C7 C8 C9 C10 C11 C13 C16 C19: library part GRM21BR61C106ME15L, "CAP CER 10UF 16V X5R 0805", Device Package="0805 (2012 Metric)", Manufacturer="Murata Electronics", Operating Temperature="-55°C ~ 85°C", Supplier Part Number 1=490-6474-1-ND, Temperature Coefficient=X5R, Tolerance=±20%, Voltage - Rated=16V, Applications="General Purpose", Capacitance="10 µF", ComponentLink1Description=Datasheet, ComponentLink1URL=https://search.murata.co.jp/Ceramy/image/img/A01X/G101/ENG/GRM21BR61C106ME15-01.pdf, ComponentLink2Description="DigiKey Link", ComponentLink2URL=https://www.digikey.com/en/products/detail/murata-electronics/GRM21BR61C106ME15L/2546905, LastUpdated="9-2-2024 20:15:38", Lifecycle Status=Active, Minimum Order=1, Mounting Type="Surface Mount, MLCC", Package / Case="0805 (2012 Metric)", Packaging=TapeAndReel, Part Number=GRM21BR61C106ME15L, Part Status=Active, partid=14090, Price=0.04, Series=GRM, Size / Dimension="0.079\" L x 0.049\" W (2.00mm x 1.25mm)", Supplier 1=DigiKey, Thickness (Max)="0.053\" (1.35mm)"
C12: library part CC0603JRNPOABN100, "CAP CER 10PF 200V C0G/NPO 0603", Device Package="0603 (1608 Metric)", Manufacturer=Yageo, Operating Temperature="-55°C ~ 125°C", Supplier Part Number 1=13-CC0603JRNPOABN100CT-ND, Temperature Coefficient="C0G, NP0", Tolerance=±5%, Voltage - Rated=200V, Applications="General Purpose", Capacitance="10 pF", ComponentLink1Description=Datasheet, ComponentLink1URL=https://www.yageo.com/upload/media/product/products/datasheet/mlcc/UPY-NP0X7R_MV_100-to-630V_21.pdf, ComponentLink2Description="DigiKey Link", ComponentLink2URL=https://www.digikey.com/en/products/detail/yageo/CC0603JRNPOABN100/5883628, LastUpdated="9-2-2024 20:09:51", Lifecycle Status=Active, Minimum Order=1, Mounting Type="Surface Mount, MLCC", Package / Case="0603 (1608 Metric)", Packaging=TapeAndReel, Part Number=CC0603JRNPOABN100, Part Status=Active, partid=42031, Price=0.01, Series=CC, Size / Dimension="0.063\" L x 0.031\" W (1.60mm x 0.80mm)", Supplier 1=DigiKey, Thickness (Max)="0.035\" (0.90mm)"
C14 C15 C17 C18 C20 C21 C22 C23: library part GCM1885G2A101JA16D, "CAP CER 100PF 100V X8G 0603", Device Package="0603 (1608 Metric)", Manufacturer="Murata Electronics", Operating Temperature="-55°C ~ 150°C", Ratings=AEC-Q200, Supplier Part Number 1=490-GCM1885G2A101JA16DCT-ND, Temperature Coefficient=X8G, Tolerance=±5%, Voltage - Rated=100V, Applications=Automotive, Capacitance="100 pF", ComponentLink1Description=Datasheet, ComponentLink1URL=https://search.murata.co.jp/Ceramy/image/img/A01X/G101/ENG/GCM1885G2A101JA16-01.pdf, ComponentLink2Description="DigiKey Link", ComponentLink2URL=https://www.digikey.com/en/products/detail/murata-electronics/GCM1885G2A101JA16D/13401834, LastUpdated="9-2-2024 20:09:40", Lifecycle Status=Active, Minimum Order=1, Mounting Type="Surface Mount, MLCC", Package / Case="0603 (1608 Metric)", Packaging=TapeAndReel, Part Number=GCM1885G2A101JA16D, Part Status=Active, partid=48316, Price=0.01, Series=GCM, Size / Dimension="0.063\" L x 0.031\" W (1.60mm x 0.80mm)", Supplier 1=DigiKey, Thickness (Max)="0.035\" (0.90mm)"
C24 C25 C26 C27 C28 C29 C30 C31: library part GRM155C8YA224KE01J, "CAP CER 0.22UF 35V X6S 0402", Device Package="0402 (1005 Metric)", Manufacturer="Murata Electronics", Operating Temperature="-55°C ~ 105°C", Supplier Part Number 1=490-GRM155C8YA224KE01JCT-ND, Temperature Coefficient=X6S, Tolerance=±10%, Voltage - Rated=35V, Applications="General Purpose", Capacitance="0.22 µF", ComponentLink1Description=Datasheet, ComponentLink1URL=https://search.murata.co.jp/Ceramy/image/img/A01X/G101/ENG/GRM155C8YA224KE01-01A.pdf, ComponentLink2Description="DigiKey Link", ComponentLink2URL=https://www.digikey.com/en/products/detail/murata-electronics/GRM155C8YA224KE01J/10693050, LastUpdated="9-2-2024 20:03:29", Lifecycle Status=Active, Minimum Order=1, Mounting Type="Surface Mount, MLCC", Package / Case="0402 (1005 Metric)", Packaging=TapeAndReel, Part Number=GRM155C8YA224KE01J, Part Status=Active, partid=55010, Price=0.01, Series=GRM, Size / Dimension="0.039\" L x 0.020\" W (1.00mm x 0.50mm)", Supplier 1=DigiKey, Thickness (Max)="0.022\" (0.55mm)"
C32 C33 C34 C35: library part GRM033R60J334ME90D, "CAP CER 0.33UF 6.3V X5R 0201", Device Package="0201 (0603 Metric)", Manufacturer="Murata Electronics", Operating Temperature="-55°C ~ 85°C", Supplier Part Number 1=490-10408-1-ND, Temperature Coefficient=X5R, Tolerance=±20%, Voltage - Rated=6.3V, Applications="General Purpose", Capacitance="0.33 µF", ComponentLink1Description=Datasheet, ComponentLink1URL=https://search.murata.co.jp/Ceramy/image/img/A01X/G101/ENG/GRM033R60J334ME90-01.pdf, ComponentLink2Description="DigiKey Link", ComponentLink2URL=https://www.digikey.com/en/products/detail/murata-electronics/GRM033R60J334ME90D/5027493, LastUpdated="11-3-2024 07:01:48", Lifecycle Status=Active, Minimum Order=1, Mounting Type="Surface Mount", Package / Case="0201 (0603 Metric)", Packaging=TapeAndReel, Part Number=GRM033R60J334ME90D, Part Status=Active, partid=1094, Price=0.01, Series=GRM, Size / Dimension="0.024\" L x 0.012\" W (0.60mm x 0.30mm)", Supplier 1=DigiKey, Thickness (Max)="0.013\" (0.33mm)"
C36 C37 C38 C39: library part GRM033R61E224KE01J, "CAP CER 0.22UF 25V X5R 0201", Device Package="0201 (0603 Metric)", Manufacturer="Murata Electronics", Operating Temperature="-55°C ~ 85°C", Supplier Part Number 1=490-GRM033R61E224KE01JCT-ND, Temperature Coefficient=X5R, Tolerance=±10%, Voltage - Rated=25V, Applications="General Purpose", Capacitance="0.22 µF", ComponentLink2Description="DigiKey Link", ComponentLink2URL=https://www.digikey.com/en/products/detail/murata-electronics/GRM033R61E224KE01J/10690160, LastUpdated="11-3-2024 07:01:28", Lifecycle Status=Active, Minimum Order=1, Mounting Type="Surface Mount, MLCC", Package / Case="0201 (0603 Metric)", Packaging=CutTape, Part Number=GRM033R61E224KE01J, Part Status=Active, partid=55140, Price=0.01, Series=GRM, Size / Dimension="0.024\" L x 0.012\" W (0.60mm x 0.30mm)", Supplier 1=DigiKey, Thickness (Max)="0.013\" (0.33mm)"
IC1: "IC REG LINEAR 3.3V 800MA SOT223", Current - Output=800mA, Current - Quiescent (Iq)="10 mA", Manufacturer=STMicroelectronics, Operating Temperature="0°C ~ 125°C", Package / Case="TO-261-4, TO-261AA", Supplier Device Package=SOT-223, Supplier Part Number 1=497-1242-1-ND, Voltage - Input (Max)=15V, Voltage - Output (Min/Fixed)=3.3V, Voltage Dropout (Max)="1.2V @ 800mA", ComponentLink1Description=Datasheet, ComponentLink1URL=http://www.st.com/content/ccc/resource/technical/document/datasheet/99/3b/7d/91/91/51/4b/be/CD00000544.pdf/files/CD00000544.pdf/jcr:content/translations/en.CD00000544.pdf, ComponentLink2Description="DigiKey Link", ComponentLink2URL=https://www.digikey.com/en/products/detail/stmicroelectronics/LD1117S33TR/585766, LastUpdated="4-2-2024 21:49:54", Lifecycle Status=Active, Minimum Order=1, Mounting Type="Surface Mount", Number of Regulators=1, Output Configuration=Positive, Output Type=Fixed, Packaging=TapeAndReel, Part Number=LD1117S33TR, Part Status=Active, Price=0.21, Protection Features="Over Current, Over Temperature", PSRR="75dB (120Hz)", Series=-, Supplier 1=DigiKey
IC2: "IC FLASH 32M SPI 133MHZ 8SOIC", Clock Frequency=133MHz, Device Package="8-SOIC (0.209\", 5.30mm Width)", Manufacturer="Winbond Electronics", Operating Temperature="-40°C ~ 85°C (TA)", Supplier Device Package=8-SOIC, Supplier Part Number 1=W25Q32JVSSIQCT-ND, Voltage - Supply="2.7V ~ 3.6V", ComponentLink1Description=Datasheet, ComponentLink1URL=http://www.winbond.com/resource-files/w25q32jv%20revg%2003272018%20plus.pdf, ComponentLink2Description="DigiKey Link", ComponentLink2URL=http://digikey.com/product-detail/en/winbond-electronics/W25Q32JVSSIQ-TR/W25Q32JVSSIQCT-ND/7393546, LastUpdated="30-3-2020 15:35:36", Lifecycle Status=Active, Memory Format=FLASH, Memory Interface="SPI - Quad I/O", Memory Size="32Mb (4M x 8)", Memory Type=Non-Volatile, Minimum Order=1, Mounting Type="Surface Mount", Package / Case="8-SOIC (0.209\", 5.30mm Width)", Packaging=TapeAndReel, Part Number="W25Q32JVSSIQ TR", Part Status=Active, partid=857, Price=0.54, Series=SpiFlash®, Supplier 1=DigiKey, Technology="FLASH - NOR", Write Cycle Time - Word, Page=3ms
J1: "CONN RCP USB3.1 TYPEC 24P SMD RA", Current Rating (Amps)="0.25A, 1A, 5A", Manufacturer=Molex, Operating Temperature="-30°C ~ 85°C", Supplier Part Number 1=WM12856CT-ND, Voltage - Rated=30VAC/DC, ComponentLink1Description=Datasheet, ComponentLink1URL=https://www.molex.com/pdm_docs/ps/PS-105448-001.pdf, ComponentLink2Description="DigiKey Link", ComponentLink2URL=http://digikey.com/product-detail/en/molex/1054500101/WM12856CT-ND/5843891, Connector Type="USB - C (Type - C)", Gender=Receptacle, LastUpdated="6-6-2020 02:14:04", Lifecycle Status=Active, Mating Cycles=10000, Minimum Order=1, Mounting Feature=Horizontal, Mounting Type="Surface Mount, Right Angle; Through Hole", Number of Contacts=24, Number of Ports=1, Packaging=TapeAndReel, Part Number=1054500101, Part Status=Active, Price=1.22, Series=105445, Shielding=Shielded, Specifications="USB 3.1 (USB 3.1 Gen 2, Superspeed+)", Supplier 1=DigiKey, Termination=Solder
J2: "M.2 0.5PITCH 4.2H KEY M 30U AU", Package=None, Check_prices=https://www.snapeda.com/parts/1-2199230-6/TE+Connectivity+AMP+Connectors/view-part/?ref=eda, Digi-Key_Part_Number=A118046TR-ND, MF="TE Connectivity", MP=1-2199230-6, Purchase-URL=https://pricing.snapeda.com/search/part/1-2199230-6/?ref=eda, SnapEDA_Link=https://www.snapeda.com/parts/1-2199230-6/TE+Connectivity+AMP+Connectors/view-part/?ref=snap
L1 L2 L3: "No Description Available", Mfr_Name=Vishay
P1 P2: "Header, 2-Pin", LatestRevisionDate=17-Jul-2002, LatestRevisionNote="Re-released for DXP Platform.", Publisher="Altium Limited"
R1: library part ERJ-6GEYJ115V, "RES SMD 1.1M OHM 5% 1/8W 0805", Device Package="0805 (2012 Metric)", Manufacturer="Panasonic Electronic Components", Operating Temperature="-55°C ~ 155°C", Power (Watts)="0.125W, 1/8W", Ratings=AEC-Q200, Supplier Device Package=0805, Supplier Part Number 1=P1.1MACT-ND, Temperature Coefficient="-400/ +150ppm/°C", Tolerance=±5%, ComponentLink1Description=Datasheet, ComponentLink1URL=http://industrial.panasonic.com/www-cgi/jvcr13pz.cgi?E+PZ+3+AOA0001+ERJ6GEYJ115V+7+WW, ComponentLink2Description="DigiKey Link", ComponentLink2URL=https://www.digikey.com/en/products/detail/panasonic-electronic-components/ERJ-6GEYJ115V/83160, Composition="Thick Film", Features="Automotive AEC-Q200", Height - Seated (Max)="0.028\" (0.70mm)", LastUpdated="8-2-2024 21:02:02", Lifecycle Status=Active, Minimum Order=1, Number of Terminations=2, Package / Case="0805 (2012 Metric)", Packaging=TapeAndReel, Part Number=ERJ-6GEYJ115V, Part Status=Active, partid=36374, Price=0.01, Resistance="1.1 MOhms", Series=ERJ-6G, Size / Dimension="0.079\" L x 0.049\" W (2.00mm x 1.25mm)", Supplier 1=DigiKey
R2 R5 R8: library part CRCW0805100KFKEA, "RES SMD 100K OHM 1% 1/8W 0805", Device Package="0805 (2012 Metric)", Manufacturer="Vishay Dale", Operating Temperature="-55°C ~ 155°C", Power (Watts)="0.125W, 1/8W", Ratings=AEC-Q200, Supplier Device Package=0805, Supplier Part Number 1=541-100KCCT-ND, Temperature Coefficient=±100ppm/°C, Tolerance=±1%, ComponentLink1Description=Datasheet, ComponentLink1URL=http://www.vishay.com/docs/20035/dcrcwe3.pdf, ComponentLink2Description="DigiKey Link", ComponentLink2URL=https://www.digikey.com/en/products/detail/vishay-dale/CRCW0805100KFKEA/1175865, Composition="Thick Film", Features="Automotive AEC-Q200", Height - Seated (Max)="0.020\" (0.50mm)", LastUpdated="8-2-2024 21:02:17", Lifecycle Status=Active, Minimum Order=1, Number of Terminations=2, Package / Case="0805 (2012 Metric)", Packaging=TapeAndReel, Part Number=CRCW0805100KFKEA, Part Status=Active, partid=32640, Price=0.01, Resistance="100 kOhms", Series=CRCW, Size / Dimension="0.079\" L x 0.049\" W (2.00mm x 1.25mm)", Supplier 1=DigiKey
R3 R6 R9: library part ERJ-6GEYJ204V, "RES SMD 200K OHM 5% 1/8W 0805", Device Package="0805 (2012 Metric)", Manufacturer="Panasonic Electronic Components", Operating Temperature="-55°C ~ 155°C", Power (Watts)="0.125W, 1/8W", Ratings=AEC-Q200, Supplier Device Package=0805, Supplier Part Number 1=P200KACT-ND, Temperature Coefficient=±200ppm/°C, Tolerance=±5%, ComponentLink1Description=Datasheet, ComponentLink1URL=http://industrial.panasonic.com/www-cgi/jvcr13pz.cgi?E+PZ+3+AOA0001+ERJ6GEYJ204V+7+WW, ComponentLink2Description="DigiKey Link", ComponentLink2URL=https://www.digikey.com/en/products/detail/panasonic-electronic-components/ERJ-6GEYJ204V/83124, Composition="Thick Film", Features="Automotive AEC-Q200", Height - Seated (Max)="0.028\" (0.70mm)", LastUpdated="8-2-2024 21:02:29", Lifecycle Status=Active, Minimum Order=1, Number of Terminations=2, Package / Case="0805 (2012 Metric)", Packaging=TapeAndReel, Part Number=ERJ-6GEYJ204V, Part Status=Active, partid=30086, Price=0.01, Resistance="200 kOhms", Series=ERJ-6G, Size / Dimension="0.079\" L x 0.049\" W (2.00mm x 1.25mm)", Supplier 1=DigiKey
R4: library part ERJ-6ENF5233V, "RES SMD 523K OHM 1% 1/8W 0805", Device Package="0805 (2012 Metric)", Manufacturer="Panasonic Electronic Components", Operating Temperature="-55°C ~ 155°C", Power (Watts)="0.125W, 1/8W", Ratings=AEC-Q200, Supplier Device Package=0805, Supplier Part Number 1=P523KCCT-ND, Temperature Coefficient=±100ppm/°C, Tolerance=±1%, ComponentLink1Description=Datasheet, ComponentLink1URL=https://industrial.panasonic.com/cdbs/www-data/pdf/RDA0000/AOA0000C304.pdf, ComponentLink2Description="DigiKey Link", ComponentLink2URL=https://www.digikey.com/en/products/detail/panasonic-electronic-components/ERJ-6ENF5233V/112137, Composition="Thick Film", Features="Automotive AEC-Q200", Height - Seated (Max)="0.028\" (0.70mm)", LastUpdated="8-2-2024 21:01:04", Lifecycle Status=Active, Minimum Order=1, Number of Terminations=2, Package / Case="0805 (2012 Metric)", Packaging=TapeAndReel, Part Number=ERJ-6ENF5233V, Part Status=Active, partid=47846, Price=0.01, Resistance="523 kOhms", Series=ERJ-6EN, Size / Dimension="0.079\" L x 0.049\" W (2.00mm x 1.25mm)", Supplier 1=DigiKey
R7: library part ERJ-6GEYJ224V, "RES SMD 220K OHM 5% 1/8W 0805", Device Package="0805 (2012 Metric)", Manufacturer="Panasonic Electronic Components", Operating Temperature="-55°C ~ 155°C", Power (Watts)="0.125W, 1/8W", Ratings=AEC-Q200, Supplier Device Package=0805, Supplier Part Number 1=P220KACT-ND, Temperature Coefficient=±200ppm/°C, Tolerance=±5%, ComponentLink1Description=Datasheet, ComponentLink1URL=http://industrial.panasonic.com/www-cgi/jvcr13pz.cgi?E+PZ+3+AOA0001+ERJ6GEYJ224V+7+WW, ComponentLink2Description="DigiKey Link", ComponentLink2URL=https://www.digikey.com/en/products/detail/panasonic-electronic-components/ERJ-6GEYJ224V/83126, Composition="Thick Film", Features="Automotive AEC-Q200", Height - Seated (Max)="0.028\" (0.70mm)", LastUpdated="8-2-2024 21:02:29", Lifecycle Status=Active, Minimum Order=1, Number of Terminations=2, Package / Case="0805 (2012 Metric)", Packaging=TapeAndReel, Part Number=ERJ-6GEYJ224V, Part Status=Active, partid=30073, Price=0.01, Resistance="220 kOhms", Series=ERJ-6G, Size / Dimension="0.079\" L x 0.049\" W (2.00mm x 1.25mm)", Supplier 1=DigiKey
R10: library part RNCS0603BKE12K1, "RES 12.1K OHM 0.1% 1/16W 0603", Device Package="0603 (1608 Metric)", Manufacturer="Stackpole Electronics Inc", Operating Temperature="-55°C ~ 155°C", Power (Watts)="0.063W, 1/16W", Ratings=AEC-Q200, Supplier Device Package=0603, Supplier Part Number 1=RNCS0603BKE12K1CT-ND, Temperature Coefficient=±25ppm/°C, Tolerance=±0.1%, ComponentLink1Description=Datasheet, ComponentLink1URL=https://www.seielect.com/catalog/sei-rncs_rnch.pdf, ComponentLink2Description="DigiKey Link", ComponentLink2URL=https://www.digikey.com/en/products/detail/stackpole-electronics-inc/RNCS0603BKE12K1/1799989, Composition="Thin Film", Features="Anti-Corrosive, Automotive AEC-Q200, Moisture Resistant", Height - Seated (Max)="0.022\" (0.55mm)", LastUpdated="9-2-2024 20:43:23", Lifecycle Status=Active, Minimum Order=1, Number of Terminations=2, Package / Case="0603 (1608 Metric)", Packaging=TapeAndReel, Part Number=RNCS0603BKE12K1, Part Status=Active, partid=8189, Price=0.06, Resistance="12.1 kOhms", Series=RNCS, Size / Dimension="0.061\" L x 0.031\" W (1.55mm x 0.80mm)", Supplier 1=DigiKey
R11: library part CR0805-FX-1002ELF, "RES SMD 10K OHM 1% 1/8W 0805", Device Package="0805 (2012 Metric)", Manufacturer="Bourns Inc.", Operating Temperature="-55°C ~ 155°C", Power (Watts)="0.125W, 1/8W", Supplier Device Package=0805, Supplier Part Number 1=CR0805-FX-1002ELFCT-ND, Temperature Coefficient=±100ppm/°C, Tolerance=±1%, ComponentLink1Description=Datasheet, ComponentLink1URL=https://www.bourns.com/docs/Product-Datasheets/CHPREZTR.pdf, ComponentLink2Description="DigiKey Link", ComponentLink2URL=https://www.digikey.com/en/products/detail/bourns-inc/CR0805-FX-1002ELF/3593209, Composition="Thick Film", Features="Moisture Resistant", Height - Seated (Max)="0.024\" (0.60mm)", LastUpdated="8-2-2024 21:01:26", Lifecycle Status=Active, Minimum Order=1, Number of Terminations=2, Package / Case="0805 (2012 Metric)", Packaging=CutTape, Part Number=CR0805-FX-1002ELF, Part Status=Active, partid=44694, Price=0.01, Resistance="10 kOhms", Series=CR0805, Size / Dimension="0.079\" L x 0.049\" W (2.00mm x 1.25mm)", Supplier 1=DigiKey
R12 R13 R14 R15: library part ERJ-1GNF2203C, "RES SMD 220K OHM 1% 1/20W 0201", Device Package="0201 (0603 Metric)", Manufacturer="Panasonic Electronic Components", Operating Temperature="-55°C ~ 125°C", Power (Watts)="0.05W, 1/20W", Ratings=AEC-Q200, Supplier Device Package=0201, Supplier Part Number 1=P122834CT-ND, Temperature Coefficient=±200ppm/°C, Tolerance=±1%, ComponentLink1Description=Datasheet, ComponentLink1URL=https://industrial.panasonic.com/cdbs/www-data/pdf/RDA0000/AOA0000C304.pdf, ComponentLink2Description="DigiKey Link", ComponentLink2URL=https://www.digikey.com/en/products/detail/panasonic-electronic-components/ERJ-1GNF2203C/2036376, Composition="Thick Film", Features="Automotive AEC-Q200", Height - Seated (Max)="0.010\" (0.26mm)", LastUpdated="11-3-2024 07:14:02", Lifecycle Status=Active, Minimum Order=1, Number of Terminations=2, Package / Case="0201 (0603 Metric)", Packaging=TapeAndReel, Part Number=ERJ-1GNF2203C, Part Status=Active, partid=822, Price=0.01, Resistance="220 kOhms", Series=ERJ-1GN, Size / Dimension="0.024\" L x 0.012\" W (0.60mm x 0.30mm)", Supplier 1=DigiKey
U1: library part CMP-015-00009-7, "ASM2464PD, is a new generation of USB4 ®/Thunderbolt to PCIe/NVMe Accessory controller based on ASMedia in-house designed PHYs.", Design Item ID=ASM2464PD, Reference=U
U2 U3 U4: "No Description Available", Mfr_Name="Texas Instruments", RefDes=RefDes, Type="Power Management"
Y1: library part ABM8G-25.000MHZ-18-D2Y-T, "CRYSTAL 25.0000MHZ 18PF SMD", Device Package="4-SMD, No Lead", ESR (Equivalent Series Resistance)="60 Ohms", Frequency Stability=±30ppm, Frequency Tolerance=±20ppm, Load Capacitance=18pF, Manufacturer="Abracon LLC", Operating Mode=Fundamental, Operating Temperature="-40°C ~ 85°C", Supplier Part Number 1=535-10275-1-ND, ComponentLink1Description=Datasheet, ComponentLink1URL=https://abracon.com/Resonators/ABM8G.pdf, ComponentLink2Description="DigiKey Link", ComponentLink2URL=http://digikey.com/product-detail/en/abracon-llc/ABM8G-25.000MHZ-18-D2Y-T/535-10275-1-ND/2218088, Frequency=25MHz, Height - Seated (Max)="0.039\" (1.00mm)", LastUpdated="19-3-2020 22:36:25", Lifecycle Status=Active, Minimum Order=1, Mounting Type="Surface Mount", Package / Case="4-SMD, No Lead", Packaging=TapeAndReel, Part Number=ABM8G-25.000MHZ-18-D2Y-T, Part Status=Active, partid=354, Price=0.34, Series=ABM8G, Size / Dimension="0.126\" L x 0.098\" W (3.20mm x 2.50mm)", Supplier 1=DigiKey, Type="MHz Crystal"

## Via types
v1: diameter 13.78, hole 7.87, Top Copper to Bottom Copper, 220 vias
v2: diameter 11.81, hole 7.87, Top Copper to Bottom Copper, 44 vias
v3: diameter 17.72, hole 7.87, Top Copper to Bottom Copper, 24 vias

## Nets (pads, with @x,y where several pads share a name; then routed paths per layer and width w, separated by ;. In a path a pad name is that pad's centre, name@x,y a point inside that pad or via, vN(x,y) a via of type N, cw(c..) or ccw(c..) an arc to the next point about the centre after c; other vN are vias at no path point)
1V05: C9.2 C10.2 C19.2 C20.2 C21.2 C22.2 C23.2 L3.1 R7.2 U1.D14 U1.D16 U1.E11 U1.E14 U1.E16 U1.F9 U1.F11 U1.F14 U1.F16 U1.H9 U1.H11 U1.H13 U1.H14 U1.H16 U1.J8 U1.J9 U1.J13 U1.J14 U1.J16 U1.J17 U1.J18 U1.J20 U1.J21 U1.K20 U1.K21 U1.L8 U1.L11 U1.L14 U1.N8 U1.N14 U1.P8 U1.P13 U1.P14 U1.T8 U1.T9 U1.T11 U1.T13 U1.T14 U1.U8 U1.U9 U4.5 | length 1600.6
  Top Copper w3.5: v1(1228.82,1629.41) U1.P8@1228.82,1603.82 U1.T8@1228.82,1578.23 ; U1.L8@1228.82,1655 U1.J8@1228.82,1680.59 U1.J9@1254.41,1680.59 ; U1.U9@1254.41,1552.64 U1.U8@1228.82,1552.64 U1.T8@1228.82,1578.23 ; U1.L11@1280,1655 U1.J9@1254.41,1680.59 ; U1.F11@1280,1731.77 U1.F9@1254.41,1731.77 U1.H9@1254.41,1706.18 U1.J9@1254.41,1680.59 ; U1.H13@1305.59,1706.18 U1.J13@1305.59,1680.59 U1.J14@1331.18,1680.59 v1(1356.77,1680.59) U1.L14@1331.18,1655 U1.N14@1331.18,1629.41 v1(1331.18,1603.82) U1.P13@1305.59,1603.82 U1.T13@1305.59,1578.23 ; U1.T14@1331.18,1578.23 U1.T13@1305.59,1578.23 ; U1.H14@1331.18,1706.18 U1.F14@1331.18,1731.77 U1.E14@1331.18,1757.36 U1.D14@1331.18,1782.95 ; U1.H16@1356.77,1706.18 U1.J17@1382.36,1680.59 ; v1(1356.77,1757.36) U1.D16@1356.77,1782.95 ; U1.T8@1228.82,1578.23 U1.T9@1254.41,1578.23 U1.T11@1280,1578.23 U1.T13@1305.59,1578.23
  Top Copper w7.87: v1(1280,1757.36) U1.F11@1280,1731.77 U1.H11@1280,1706.18 U1.H13@1305.59,1706.18 U1.H14@1331.18,1706.18 U1.H16@1356.77,1706.18 ; v1(1356.77,1757.36) U1.F16@1356.77,1731.77 U1.H16@1356.77,1706.18 ; U1.J20@1442.99,1691.22 1435.51,1683.74 1435.51,1680.59 ; U1.J21@1461.1,1691.22 U1.K21@1461.1,1673.11 ; v3(1510.83,1775.59) 1507.88,1712.72 ccw(c1515.75,1712.4) 1507.87,1712.46 cw(c1490.16,1712.6) 1499.84,1697.76 1462.09,1673.11 U1.K21@1461.1,1673.11 ; U1.H16@1356.77,1706.18 U1.J17@1382.36,1680.59 U1.J18@1407.95,1680.59 1435.51,1680.59 ; 1435.51,1680.59 U1.K20@1442.99,1673.11 U1.K21@1461.1,1673.11
  Top Copper w10: U4.5@2972.19,2359.33 2972.19,2336.56 3038.83,2269.93 3090.87,2269.93 3095.85,2274.9 3095.85,2292.4 L3.1@3103.35,2299.9 3103.35,2160.43 C10.2@3117.13,2146.65
  Top Copper w25: v1(3110.24,2090.55) 3117.13,2097.44 C10.2@3117.13,2146.65
  other v2: 3050.47,2098.86 3076.68,2100.22 3049.49,2122.48 3073.11,2123.47 3073.26,2145.7 3049.49,2148.07 3074.86,2166.88 3048.28,2169.83 3073.87,2189.52 3049.27,2191.49 3071.9,2213.14 3050.2,2213.58 3049.21,2234.25 3072.83,2235.24
1V8: C6.2 C7.2 C16.2 C17.2 C18.2 L2.1 R4.2 U1.L6 U1.L16 U1.L17 U1.L18 U1.L20 U1.L21 U1.N6 U1.N16 U1.P6 U1.P16 U1.T6 U1.T16 U1.U6 U1.U11 U1.U13 U1.U14 U1.U16 U3.5 | length 976.8
  Top Copper w3.5: v1(1202.76,1654.53) 1203.23,1654.06 U1.N6@1203.23,1629.41 v1(1203.23,1603.82) U1.T6@1203.23,1578.23 U1.U6@1203.23,1552.64 ccw(c1206.72,1552.91) 1204.22,1550.46 1210.6,1544.08 cw(c1208.11,1541.62) 1210.72,1543.96 1212.03,1542.5 ccw(c1214.63,1544.84) 1214.63,1541.34 1268.7,1541.34 U1.U11@1280,1552.64 U1.U13@1305.59,1552.64 U1.U14@1331.18,1552.64 v1(1356.77,1552.64) U1.T16@1356.77,1578.23 U1.P16@1356.77,1603.82 U1.N16@1356.77,1629.41 U1.L16@1356.77,1655 U1.L17@1382.36,1655 U1.L18@1407.95,1655 U1.L20@1442.99,1655 U1.L21@1461.1,1655
  Top Copper w25: 2227.36,2355.32 2299.88,2282.8 2384.33,2282.8 L2.1@2393.7,2292.17 ; L2.1@2393.7,2320.28 L2.1@2393.7,2292.17 ; v1(2396.77,2104.01) 2399.61,2106.85 C7.2@2399.61,2158.46 2399.61,2235.46 2393.7,2241.37 L2.1@2393.7,2292.17
  Bottom Copper w3.5: C18.2@1180.12,1615.16 1191.46,1603.82 v1(1203.23,1603.82)
  Bottom Copper w15: C16.2@1173.23,1697.83 1175.2,1697.83 1193.29,1679.74 1193.29,1677.78 1202.76,1668.31 v1(1202.76,1654.53)
  other v2: 2335.63,2127.95 2356.3,2128.94 2335.63,2149.61 2357.28,2150 2335.63,2170.28 2358.27,2171.06 2336.61,2189.96 2358.27,2192.13 2335.63,2211.61 2356.3,2213.19 2335.63,2232.28 2358.27,2234.25
3V3: C1.2 C2.2 C13.2 C14.2 C15.2 J2.2 J2.4 J2.12 J2.14 J2.16 J2.18 J2.70 J2.72 J2.74 L1.1 R1.2 R11.2 U1.D6 U1.D8 U1.D9 U1.D13 U1.E6 U1.E8 U1.E9 U1.E13 U1.F6 U1.F13 U1.H6 U2.5 | length 5183.4
  Top Copper w3.5: U1.H6@1203.23,1706.18 1203.23,1724.57 ; U1.F6@1203.23,1731.77 1203.23,1724.57 ; U1.D6@1203.23,1782.95 U1.E6@1203.23,1757.36 1203.23,1754.66 1186.82,1738.26 1186.82,1727.97 1181.44,1722.58 1181.03,1722.58 1168.45,1710.01 1168.45,1702.38 1173.83,1696.99 1181.44,1696.99 1194.04,1709.59 1194.04,1715.38 1203.23,1724.57 ; v1(1254.41,1757.36) v1(1254.41,1782.95) ; U1.F13@1305.59,1731.77 U1.E13@1305.59,1757.36 U1.D13@1305.59,1782.95 1296.26,1773.62 1263.74,1773.62 v1(1254.41,1782.95) ; 1203.23,1724.57 1227.98,1749.32 1227.98,1756.53 U1.E8@1228.82,1757.36 U1.D8@1228.82,1782.95 v1(1254.41,1782.95)
  Top Copper w10: U2.5@1551.44,2368.15 U2.5@1560.94,2368.15 ; R1.2@1566.89,2287.68 1566.89,2362.2 U2.5@1560.94,2368.15 ; L1.1@1687.44,2329.16 1679.94,2321.66 1679.94,2304.16 1674.96,2299.18 1622.92,2299.18 1617.94,2304.16 1617.94,2354.38 1612.08,2360.24 1588.85,2360.24 1580.94,2368.15 U2.5@1560.94,2368.15 ; 4047.24,1931.1 4047.24,1890.54 4099.83,1837.96 4103.97,1837.96 4109.25,1832.68 J2.12@4133.86,1832.68 J2.14@4133.86,1812.99 J2.16@4133.86,1793.31 J2.18@4133.86,1773.62 ; v1(4055.12,1232.28) 4108.35,1260.91 J2.70@4133.86,1261.81 J2.72@4133.86,1242.13 J2.74@4133.86,1222.44 4133.86,1192.41 4231.78,1094.49 4537.4,1094.49 4659.45,1216.54 R11.2@4663.39,1216.54 ; J2.4@4133.86,1911.42 J2.2@4133.86,1931.1
  Top Copper w25: L1.1@1687.44,2329.16 1687.44,2172.8 C1.2@1697.83,2162.4 1710.93,2149.31 1710.93,2136.53 1916.35,1931.1 4047.24,1931.1 J2.2@4133.86,1931.1
  Signal Layer 3 w10: v1(4055.12,1232.28) 4060.01,1815.83 cw(c4070.01,1815.7) 4062.93,1822.78 v1(4087.6,1847.44)
  Bottom Copper w10: C15.2@1243.11,1761.81 C15.2@1244.09,1762.8
  Bottom Copper w25: C15.2@1244.09,1762.8 1243.6,1763.29 1243.6,1825.3 C14.2@1244.09,1825.79 1246.06,1825.79 1252.95,1832.68 C13.2@1314.96,1832.68
  other v1: 1620.08,2178.15
  other v2: 1622.05,2152.56 1647.64,2152.56 1594.49,2153.54 1567.91,2155.51 1643.51,2179.38 1593.5,2181.1 1568.9,2185.04 1615.16,2208.66 1640.75,2208.66 1592.52,2209.65 1568.9,2210.63
3V3A: C5.2 IC1.2 IC1.4 IC2.3 IC2.7 IC2.8 U1.H5 | length 1903.2
  Top Copper w3.5: U1.H5@1177.64,1706.18 1187.04,1715.58 1187.04,1718.28 1193.82,1725.07 1193.82,1735.36 1203.03,1744.57 1203.43,1744.57 1212.42,1753.56 1212.42,1780.95 cw(c1215.92,1780.95) 1212.58,1782.03 v1(1217.2,1796.33)
  Top Copper w10: v1(534.45,2475.39) 534.72,2475.12 534.72,2415.04 IC2.8@535,2414.76 IC2.7@585,2414.76 ; IC2.3@635,2135.24 635,2135.98 635.83,2136.81 645.67,2126.97 v1(645.67,2081.69) ; C5.2@1006.89,2080.02 1006.89,2152.87 IC1.2@1025,2170.98 IC1.4@1025,2419.02 1025,2490.75 v1(1022.64,2493.11)
  Signal Layer 2 w3.5: v1(1006.76,2080.02) 1006.76,1985.7 1191.02,1801.45 ; 1191.04,1801.42 ccw(c1193.49,1803.92) 1193.55,1800.42 cw(c1193.6,1796.92) 1194.06,1800.39 ; 1194.08,1800.39 cw(c1193.6,1796.92) 1194.19,1800.37 v1(1217.2,1796.33)
  Signal Layer 3 w10: v1(534.45,2475.39) 645.67,2364.17 v1(645.67,2081.69) 646.45,2082.47 669.53,2082.47 676.78,2089.72 769.8,2089.72 796.69,2062.83 989.58,2062.83 v1(1006.76,2080.02)
CC1: J1.A5 U1.AA6 | length 994.6
  Top Copper w3.5: J1.A5@312.8,1674.53 332.77,1674.53 ccw(c332.77,1678.03) 333.68,1674.65 336.63,1675.44 cw(c340.64,1660.43) 346.57,1674.79 ccw(c347.89,1678.03) 347.89,1674.53 612.83,1674.53 cw(c612.83,1671.03) 615.3,1673.5 628.37,1660.43 840.2,1660.43 ; 840.23,1660.43 cw(c840.16,1656.93) 842.54,1659.51 v1(1030.51,1486.22)
  Signal Layer 2 w3.5: v1(1030.51,1486.22) 1074.86,1467.43 cw(c1073.47,1464.21) 1075.1,1467.31 ccw(c1076.77,1470.39) 1076.77,1466.89 1113.85,1466.89 1132.66,1485.69 1132.66,1493.2 1147.11,1507.66 1159.98,1507.66 1171.5,1496.14 1171.5,1488 1184.76,1474.73 1188.61,1474.73 v1(1189.45,1473.9)
CC2: J1.B5 U1.Y6 | length 1692.9
  Top Copper w3.5: v1(226.12,1600.97) 229.97,1600.97 234.63,1605.63 J1.B5@261.61,1605.63
  Signal Layer 2 w3.5: v1(226.12,1600.97) 190.94,1565.79 190.94,1485.24 491.14,1185.04 1251.42,1185.04 ccw(c1251.42,1188.54) 1254.92,1188.54 1254.92,1283.72 ccw(c1251.42,1283.72) 1253.9,1286.19 1229.33,1310.76 1229.33,1420.16 1231.94,1422.77 1231.94,1439.33 1210.14,1461.13 1210.14,1475.17 1194.14,1491.17 1190.29,1491.17 v1(1189.45,1492.01)
CLKREQ#: J2.52 U1.A19 | length 2919.4
  Top Copper w3.5: U1.A19@1424.88,1836.1 1480.51,1891.73 1589.57,1891.73 1746.79,1734.51 ccw(c1749.26,1736.99) 1749.26,1733.49 3097.35,1733.49 cw(c3097.36,1712.44) 3112.2,1727.36 3384.5,1455.06 cw(c3382,1452.61) 3385.42,1453.38 ccw(c3400.59,1456.69) 3393.58,1442.84 3400.46,1439.35 ccw(c3402.04,1442.48) 3402.04,1438.98 J2.52@4133.86,1438.98